# Altium PCB PCB1.PcbDoc
Units mil, origin at the board's own origin, x right, y up, seen from the top; angles counter-clockwise.
Board outline 6000 x 4000 mil, 2 copper layers (Top Layer, Bottom Layer); 98 components, 112 nets, 517 pads, 170 vias.
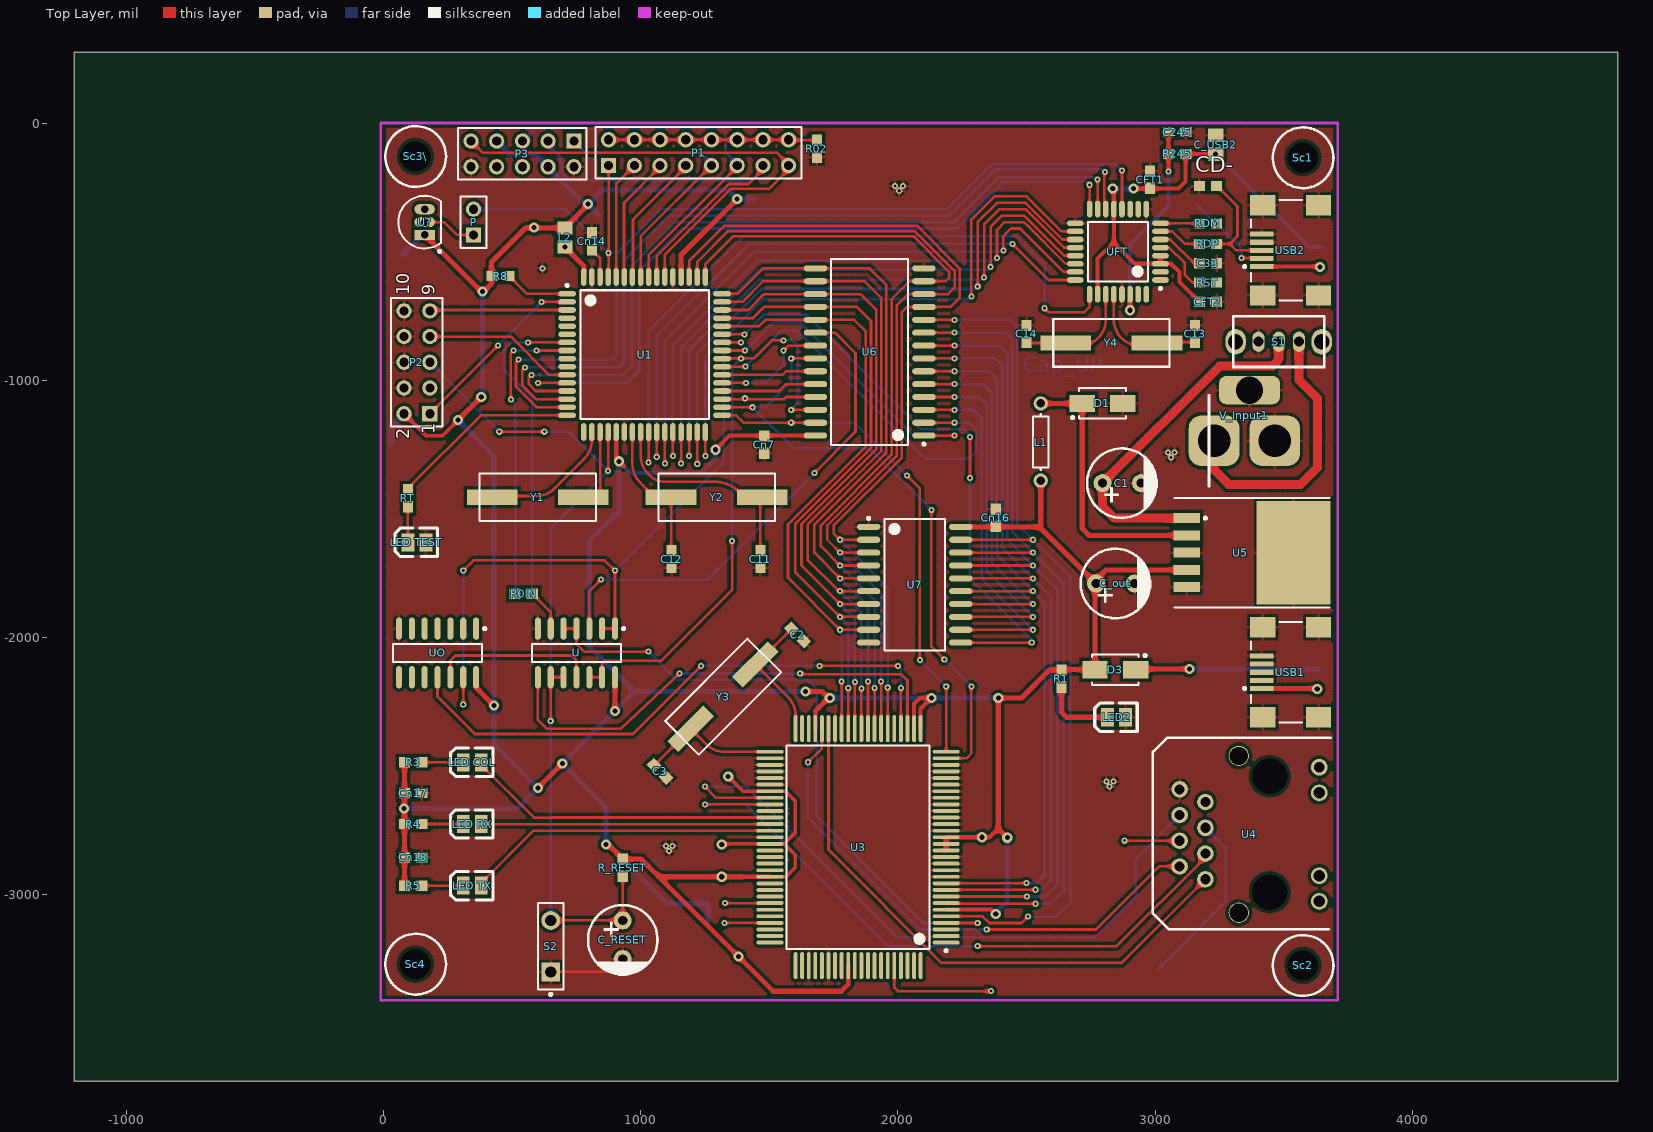
[diagram p0: Top Layer view]
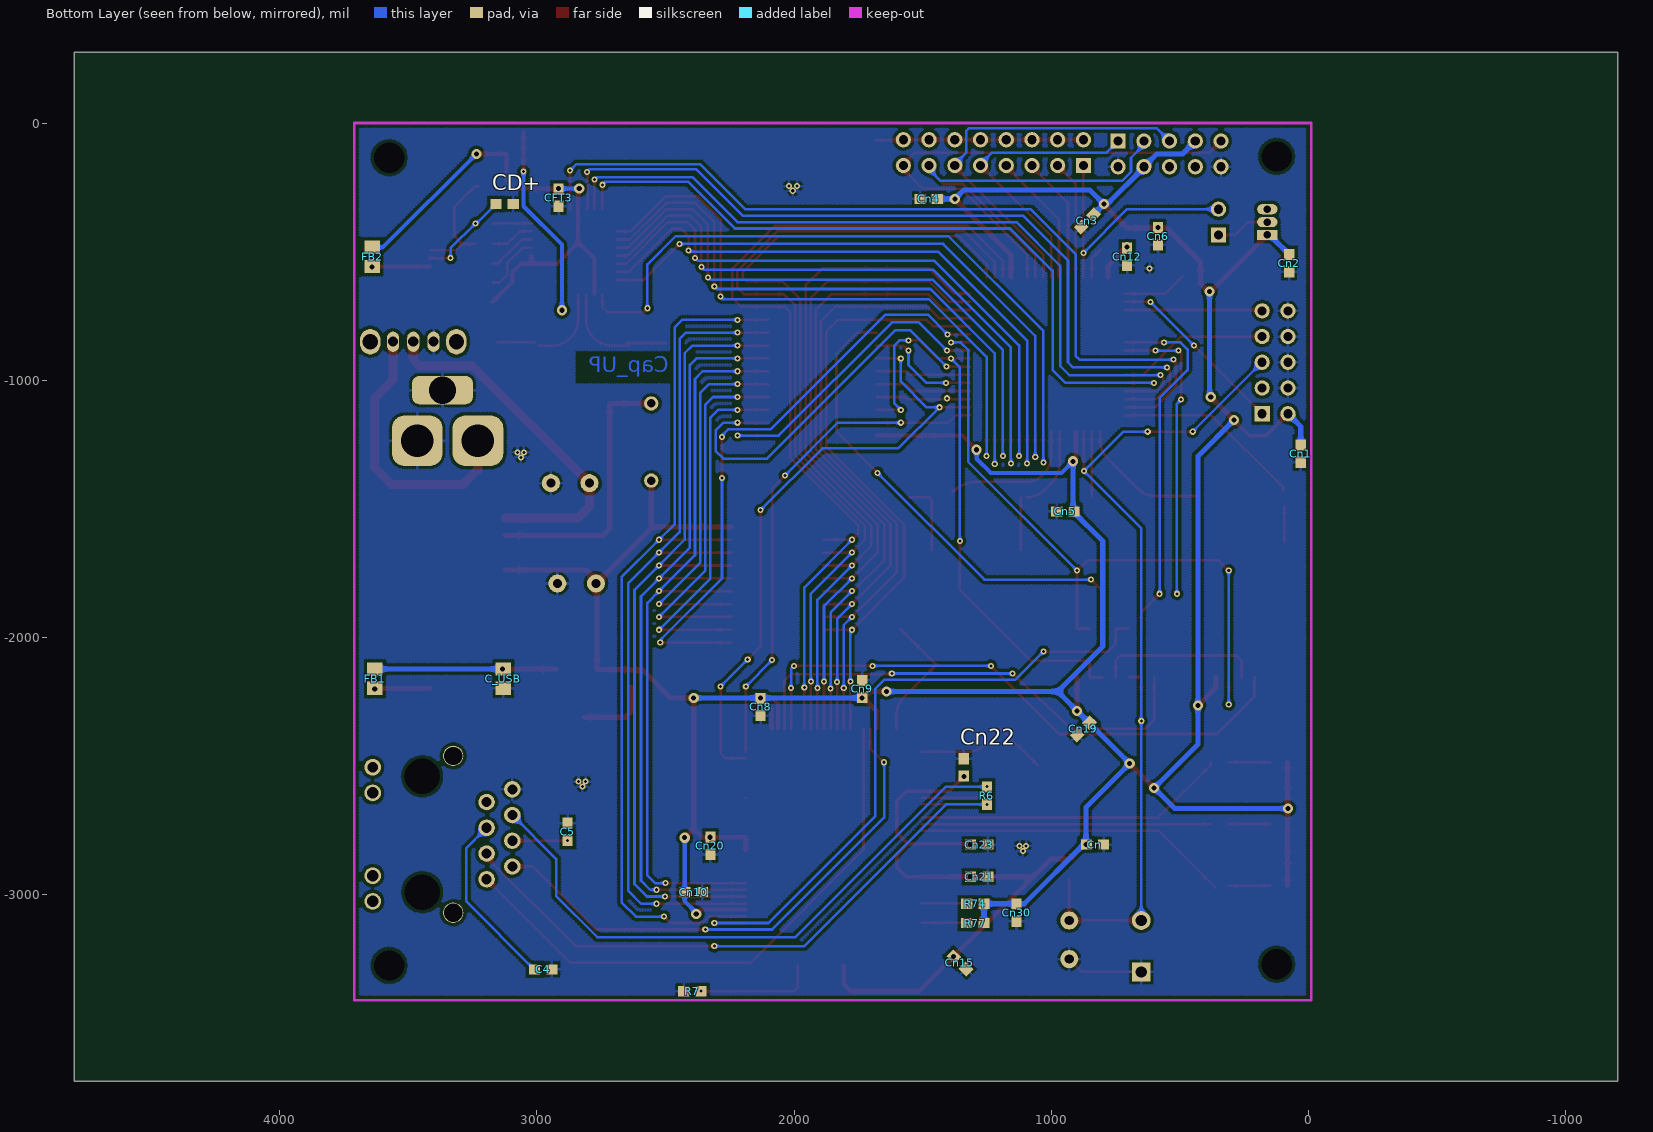
[diagram p1: Bottom Layer view, seen from below]

## Layer stack, top to bottom
Top Solder: solder mask 0.4, Solder Resist, Dk 3.5
Top Layer: signal copper 1.4
Dielectric 1: dielectric 12.6, FR-4, Dk 4.8
Bottom Layer: signal copper 1.4
Bottom Solder: solder mask 0.4, Solder Resist, Dk 3.5

## Board outline
-1202.07,-3725 4797.93,-3725 4797.93,275 -1202.07,275

## Design rules (kind name [scope] priority, off if disabled: settings)
Clearance Clearance_1 [InNamedPolygon('Bottom Layer-No Net')] p1: gap=10
Clearance [All] p2: gap=8
PolygonConnect [All] p1: connectstyle=Relief reliefconductorwidth=10 reliefentries=4 polygonreliefangle="90 Angle" airgapwidth=10
RoutingVias [All] p1: holewidth=28 width=50 viastyle="Through Hole" minholewidth=28 minwidth=50 maxholewidth=28 maxwidth=50
SolderMaskExpansion [All] p1: expansion=4
Width [All] p1: maxlimit=35 minlimit=10 preferedwidth=20
30 further rules are at their usual default settings.

## Classes and differential pairs
component class "SRAM & Expansion Port": U U6 U7
component class "Power Supply": C1 C_out C_RESET C_USB Cn Cn1 Cn2 Cn3 Cn4 Cn5 Cn6 Cn7 Cn8 Cn9 Cn10 Cn15 Cn16 Cn17 Cn18 Cn19 Cn20 Cn21 Cn22 Cn23 Cn30 D1 D3 FB1 L1 LED2 R1 R_RESET S1 S2 Sc1 Sc2 Sc3\ Sc4 U5 USB1 V_Input1
component class "Ethernet Interface": C2 C3 C4 C5 "LED COL" "LED RX" "LED TX" R0IN R3 R4 R5 R6 R7 R74 R77 U3 U4 UO Y3
component class CPU: C11 C12 C13 C14 C33 C245 C_USB2 CD+ CD- CFT1 CFT2 CFT3 Cn12 Cn14 FB2 L2 "LED TEST" P P1 P2 P3 R02 R8 R245 RDM RDP RST RT U1 U? UFT USB2 Y1 Y2 Y4

## Components (designator, comment, footprint, x,y, rotation, side; value= is the part's Value field where it differs from the comment)
C1 "Cap_El" CA1.5P 2870,-1400 r0 top
C2 "Cap_UP" 1608[0603] 1610,-1990 r315 top
C3 "Cap_UP" 1608[0603] 1075,-2520 r315 top
C4 "Cap_UP" 1608[0603] 2975,-3290 r0 bottom
C5 "Cap_UP" 1608[0603] 2880,-2755 r270 bottom
C11 "Cap_UP" 1608[0603] 1465,-1695 r270 top
C12 "Cap_UP" 1608[0603] 1120,-1695 r270 top
C13 "Cap_UP" 1608[0603] 3155,-820 r90 top
C14 "Cap_UP" 1608[0603] 2500,-820 r90 top
C33 "Cap_UP" 1608[0603] 3205,-545 r0 top
C245 "Cap_UP" 1608[0603] 3085,-35 r0 top
C_out "Cap_El" CA1.5P 2845,-1790 r0 top
C_RESET "Cap_El" CA1.5P 930,-3175 r270 top
C_USB "Cap_UP" 2012[0805] 3130,-2160 r270 bottom
C_USB2 "Cap_UP" 2012[0805] 3235,-85 r90 top
CD+ "Cap" 1608[0603] 3125,-315 r0 bottom
CD- "Cap" 1608[0603] 3205,-245 r0 top
CFT1 "Cap" 1608[0603] 2980,-220 r270 top
CFT2 "Cap" 1608[0603] 3205,-695 r180 top
CFT3 "Cap" 1608[0603] 2915,-290 r90 bottom
Cn "Cap" 1608[0603] 830,-2805 r180 bottom
Cn1 "Cap" 1608[0603] 30,-1285 r90 bottom
Cn2 "Cap" 1608[0603] 75,-545 r90 bottom
Cn3 "Cap" 1608[0603] 860,-380 r135 bottom
Cn4 "Cap" 1608[0603] 1476.54,-295 r180 bottom
Cn5 "Cap" 1608[0603] 945,-1510 r180 bottom
Cn6 "Cap" 1608[0603] 585,-440 r90 bottom
Cn7 "Cap" 1608[0603] 1480,-1250 r90 top
Cn8 "Cap" 1608[0603] 2130,-2270 r90 bottom
Cn9 "Cap" 1608[0603] 1735,-2200 r270 bottom
Cn10 "Cap" 1608[0603] 2390,-2990 r0 bottom
Cn12 "Cap" 1608[0603] 705,-520 r90 bottom
Cn14 "Cap" 1608[0603] 810,-460 r90 top
Cn15 "Cap" 1608[0603] 1355,-3265 r45 bottom
Cn16 "Cap" 1608[0603] 2380,-1535 r270 top
Cn17 "Cap" 1608[0603] 115,-2605 r180 top
Cn18 "Cap" 1608[0603] 115,-2855 r180 top
Cn19 "Cap" 1608[0603] 875,-2355 r135 bottom
Cn20 "Cap" 1608[0603] 2325,-2810 r90 bottom
Cn21 "Cap" 1608[0603] 1280,-2930 r0 bottom
Cn22 "Cap" 1608[0603] 1340,-2505 r270 bottom
Cn23 "Cap" 1608[0603] 1280,-2805 r0 bottom
Cn30 "Cap" 1608[0603] 1135,-3070 r270 bottom
D1 "1N5822" US1M 2795,-1090 r180 top
D3 "1N5819" us1m 2845,-2125 r0 top
FB1 "" 2012[0805] 3630,-2160 r90 bottom
FB2 "" 2012[0805] 3640,-520 r90 bottom
L1 "Inductor" AXIAL-0.3 2555,-1240 r270 top
L2 "Inductor" 2012[0805] 705,-445 r270 top
LED2 "LED2" 3518 2850,-2310 r180 top
"LED COL" "Yellow" 3518 345,-2485 r180 top
"LED RX" "Green" 3518 345,-2725 r180 top
"LED TEST" "BLUE" 3518 130,-1630 r180 top
"LED TX" "Yellow" 3518 345,-2965 r180 top
P "Header 2" HDR1X2 350,-435 r90 top
P1 "Header 8X2" HDR2X8 875,-165 r0 top
P2 "SPI" HDR2X5 180,-1130 r90 top
P3 "JTAG" HDR2X5 740,-70 r180 top
R0IN "Res" 1608[0603] 545,-1830 r180 top
R1 "Res" 1608[0603] 2635,-2160 r90 top
R02 "Res" 1608[0603] 1685,-100 r90 top
R3 "Res" 1608[0603] 115,-2485 r180 top
R4 "Res" 1608[0603] 115,-2725 r180 top
R5 "Res" 1608[0603] 115,-2965 r180 top
R6 "Res" 1608[0603] 1250,-2615 r270 bottom
R7 "Res" 1608[0603] 2395,-3375 r180 bottom
R8 "Res" 1608[0603] 455,-595 r0 top
R74 "Res" 1608[0603] 1295,-3035 r0 bottom
R77 "Res" 1608[0603] 1295,-3110 r0 bottom
R245 "Res" 1608[0603] 3085,-120 r180 top
R_RESET "Res" 1608[0603] 930,-2895 r270 top
RDM "Res" 1608[0603] 3205,-390 r180 top
RDP "es" 1608[0603] 3205,-470 r180 top
RST "Res" 1608[0603] 3205,-620 r0 top
RT "Res" 1608[0603] 95,-1458.46 r90 top
S1 "SW-SPDT" SW-SPDT 3480,-850 r0 top
S2 "SW-PB" SPST-2 650,-3200 r90 top
Sc1 "Screw Hole" "Screw Holw 3-6 mm" 3575,-135 r0 top
Sc2 "Screw Hole" "Screw Holw 3-6 mm" 3575,-3275 r0 top
Sc3\ "Screw Hole" "Screw Holw 3-6 mm" 125,-130 r0 top
Sc4 "Screw Hole" "Screw Holw 3-6 mm" 125,-3270 r0 top
U "SN74HC00D" D014_N 750,-2060 r270 top
U1 "ATmega128A-AU" 64A_N 1015,-900 r0 top
U3 "RTL8019AS" RTL8019AS 1845,-2815 r180 top
U4 "RJ5con_filter" RJ45con_Filter 3445,-2765 r270 top
U5 "LM2576D2T-5" 936A-02 3330,-1670 r270 top
U6 "K6X0808C1D-GF55" PRSP0028DB-B_N 1890,-890 r180 top
U7 "74AC573M" SO20_N 2065,-1795 r0 top
U? "LM35DZ" Z03A 160,-385 r0 top
UFT "FT245BL" LQFP-32_N 2855,-500 r180 top
UO "HCF4071BM1" SO14_N 210,-2060 r270 top
USB1 "" USB_Mini 3570,-2135 r90 top
USB2 "" USB_Mini 3570,-495 r90 top
V_Input1 "CHARGER" CHARGER 3465,-1235 r90 top
Y1 "32.67KHz" Xtal-smd 600,-1455 r180 top
Y2 "14.7456 MHz" Xtal-smd 1295,-1455 r180 top
Y3 "20 MHz" Xtal-smd 1320,-2230 r225 top
Y4 "6 MHz" Xtal-smd 2830,-855 r0 top

## Footprints (in the part's own frame and the unit in brackets; to place one, negate y for a bottom-side part, rotate by r counter-clockwise, add the part's x,y. Pads: shape width x height; smd on the part's side, far side on the other; paste and mask are expansions set on the pad)
64A_N [mm] "Thin QFP, 64-Leads, Body 14x14mm, Pitch 0.8mm, IPC Medium Density"
  oval 1.75x0.55 smd: 1(-7.65,6) 2(-7.65,5.2) 3(-7.65,4.4) 4(-7.65,3.6) 5(-7.65,2.8) 6(-7.65,2) 7(-7.65,1.2) 8(-7.65,0.4) 9(-7.65,-0.4) 10(-7.65,-1.2) 11(-7.65,-2) 12(-7.65,-2.8) 13(-7.65,-3.6) 14(-7.65,-4.4) 15(-7.65,-5.2) 16(-7.65,-6) 33(7.65,-6) 34(7.65,-5.2) 35(7.65,-4.4) 36(7.65,-3.6) 37(7.65,-2.8) 38(7.65,-2) 39(7.65,-1.2) 40(7.65,-0.4) 41(7.65,0.4) 42(7.65,1.2) 43(7.65,2) 44(7.65,2.8) 45(7.65,3.6) 46(7.65,4.4) 47(7.65,5.2) 48(7.65,6)
  oval 0.55x1.75 smd: 17(-6,-7.65) 18(-5.2,-7.65) 19(-4.4,-7.65) 20(-3.6,-7.65) 21(-2.8,-7.65) 22(-2,-7.65) 23(-1.2,-7.65) 24(-0.4,-7.65) 25(0.4,-7.65) 26(1.2,-7.65) 27(2,-7.65) 28(2.8,-7.65) 29(3.6,-7.65) 30(4.4,-7.65) 31(5.2,-7.65) 32(6,-7.65) 49(6,7.65) 50(5.2,7.65) 51(4.4,7.65) 52(3.6,7.65) 53(2.8,7.65) 54(2,7.65) 55(1.2,7.65) 56(0.4,7.65) 57(-0.4,7.65) 58(-1.2,7.65) 59(-2,7.65) 60(-2.8,7.65) 61(-3.6,7.65) 62(-4.4,7.65) 63(-5.2,7.65) 64(-6,7.65)
  silkscreen extent -7.77,-6.35 6.35,6.95, body extent -7,-7 7,7, height 1.2
936A-02 [mm] "D2-PAK; 5 Leads; Body 14.7 (inc. leads) x 10.2 mm (LxW max)"
  rect 1x2.6 smd: 1(-3.4,-5.275) 2(-1.7,-5.275) 3(0,-5.275) 4(1.7,-5.275) 5(3.4,-5.275)
  rect 10.2x7.3 smd: 6(0,5.275)
  silkscreen extent -5.4,-6.48 5.4,8.82
1608[0603] [mm] "Chip Capacitor; Body 1.6 x 0.8 mm (LxW typ)"
  rect 1.1x1 smd: 1(-0.85,0) 2(0.85,0)
  body extent -1.12,-0.5 1.12,0.5, height 0.5
2012[0805] [mm] "Chip Resistor; Body 2.0 x 1.3 mm (LxW typ)"
  rect 1.3x1.5 smd: 1(-0.95,0) 2(0.95,0)
  body extent -1.22,-0.75 1.28,0.75, height 0.5
3518 [mil]
  rect 50x70 smd: 1(35,0) 2(-35,0)
  silkscreen extent -80,-55 85,55, body extent -63,-31 63,32, height 43
AXIAL-0.3 [mm]
  round 1.4 hole 0.85: 1(-3.81,0) 2(3.81,0)
  silkscreen extent -2.77,-0.76 2.77,0.76, body extent -2.85,-0.87 2.85,0.87, height 2
CA1.5P [mil]
  round 70 hole 35.43: 1(-75,0) 2(75,0)
  silkscreen extent -135,-135 135,135
CHARGER [mm]
  rrect50% 2.8x6 hole 2.7: 1(5,2.5)
  rrect50% 5x5 hole 3.2: 2(0,0) 3(0,6)
  silkscreen extent -4.5,6.5 4.5,6.5
D014_N [mm] "SOIC, 14-Leads, Body 8.7x3.9mm, Pitch 1.27mm, IPC Medium Density"
  oval 2.2x0.6 smd: 1(-2.4,3.81) 2(-2.4,2.54) 3(-2.4,1.27) 4(-2.4,0) 5(-2.4,-1.27) 6(-2.4,-2.54) 7(-2.4,-3.81) 8(2.4,-3.81) 9(2.4,-2.54) 10(2.4,-1.27) 11(2.4,0) 12(2.4,1.27) 13(2.4,2.54) 14(2.4,3.81)
  silkscreen extent -2.52,-4.4 0.9,4.79, body extent -1.95,-4.33 1.95,4.33, height 1.75
HDR1X2 [mm] "Connector; Header; 2 Position"
  rect 1.5x1.5 hole 0.9: 1(0,0)
  round 1.5 hole 0.9: 2(2.54,0)
  silkscreen extent -1.27,-1.27 3.81,1.27
HDR2X5 [mm] "Connector; Header; 5x2 Position"
  rect 1.5x1.5 hole 0.9: 1(0,0)
  round 1.5 hole 0.9: 2(0,2.54) 3(2.54,0) 4(2.54,2.54) 5(5.08,0) 6(5.08,2.54) 7(7.62,0) 8(7.62,2.54) 9(10.16,0) 10(10.16,2.54)
  silkscreen extent -1.27,-1.27 11.43,3.81
HDR2X8 [mm] "Connector; Header; 8x2 Position"
  rect 1.5x1.5 hole 0.9: 1(0,0)
  round 1.5 hole 0.9: 2(0,2.54) 3(2.54,0) 4(2.54,2.54) 5(5.08,0) 6(5.08,2.54) 7(7.62,0) 8(7.62,2.54) 9(10.16,0) 10(10.16,2.54) 11(12.7,0) 12(12.7,2.54) 13(15.24,0) 14(15.24,2.54) 15(17.78,0) 16(17.78,2.54)
  silkscreen extent -1.27,-1.27 19.05,3.81
LQFP-32_N [mm] "Thin QFP, 32-Leads, Body 7x7mm, Pitch 0.8mm, IPC Medium Density"
  oval 1.65x0.55 smd: 1(-4.2,2.8) 2(-4.2,2) 3(-4.2,1.2) 4(-4.2,0.4) 5(-4.2,-0.4) 6(-4.2,-1.2) 7(-4.2,-2) 8(-4.2,-2.8) 17(4.2,-2.8) 18(4.2,-2) 19(4.2,-1.2) 20(4.2,-0.4) 21(4.2,0.4) 22(4.2,1.2) 23(4.2,2) 24(4.2,2.8)
  oval 0.55x1.65 smd: 9(-2.8,-4.2) 10(-2,-4.2) 11(-1.2,-4.2) 12(-0.4,-4.2) 13(0.4,-4.2) 14(1.2,-4.2) 15(2,-4.2) 16(2.8,-4.2) 25(2.8,4.2) 26(2,4.2) 27(1.2,4.2) 28(0.4,4.2) 29(-0.4,4.2) 30(-1.2,4.2) 31(-2,4.2) 32(-2.8,4.2)
  silkscreen extent -4.33,-2.95 2.95,3.75, body extent -3.5,-3.5 3.5,3.5, height 1.6
PRSP0028DB-B_N [mm] "SOIC, 28-Leads, Body 17.5x8.4mm, Pitch 1.27mm, IPC Medium Density"
  oval 2.3x0.6 smd: 1(-5.35,8.255) 2(-5.35,6.985) 3(-5.35,5.715) 4(-5.35,4.445) 5(-5.35,3.175) 6(-5.35,1.905) 7(-5.35,0.635) 8(-5.35,-0.635) 9(-5.35,-1.905) 10(-5.35,-3.175) 11(-5.35,-4.445) 12(-5.35,-5.715) 13(-5.35,-6.985) 14(-5.35,-8.255) 15(5.35,-8.255) 16(5.35,-6.985) 17(5.35,-5.715) 18(5.35,-4.445) 19(5.35,-3.175) 20(5.35,-1.905) 21(5.35,-0.635) 22(5.35,0.635) 23(5.35,1.905) 24(5.35,3.175) 25(5.35,4.445) 26(5.35,5.715) 27(5.35,6.985) 28(5.35,8.255)
  silkscreen extent -5.48,-9.2 3.8,9.23, body extent -4.51,-9.25 4.51,9.25, height 2.4
RJ45con_Filter [mm]
  round 1.624 hole 1: 1(4.44,-6.35) 2(3.18,-8.89) 3(1.9,-6.35) 4(0.64,-8.89) 5(-0.64,-6.35) 6(-1.9,-8.89) 7(-3.18,-6.35) 8(-4.44,-8.89)
  round 1.654 hole 1.12: 9(6.625,4.9) 10(4.085,4.9) 11(-4.085,4.9)
  round 1.654 hole 1.02: 12(-6.625,4.9)
  round 2 hole 1.793: hole(-7.745,-3.05) hole(7.745,-3.05)
  round 1.524 hole 3.5: hole(-5.715,0) hole(5.715,0)
  silkscreen extent -9.55,-11.53 9.37,6.02
RTL8019AS [mil] "QFP, 100-Leads, Body 14.00x20.00mm, Pitch 0.65mm, IPC Medium Density"
  oval 105x15 smd: 1(-342.52,371.06) 2(-342.52,345.47) 3(-342.52,319.88) 4(-342.52,294.29) 5(-342.52,268.7) 6(-342.52,243.11) 7(-342.52,217.52) 8(-342.52,191.93) 9(-342.52,166.34) 10(-342.52,140.75) 11(-342.52,115.16) 12(-342.52,89.57) 13(-342.52,63.98) 14(-342.52,38.39) 15(-342.52,12.8) 16(-342.52,-12.8) 17(-342.52,-38.39) 18(-342.52,-63.98) 19(-342.52,-89.57) 20(-342.52,-115.16) 21(-342.52,-140.75) 22(-342.52,-166.34) 23(-342.52,-191.93) 24(-342.52,-217.52) 25(-342.52,-243.11) 26(-342.52,-268.7) 27(-342.52,-294.29) 28(-342.52,-319.88) 29(-342.52,-345.47) 30(-342.52,-371.06) 51(342.52,-371.06) 52(342.52,-345.47) 53(342.52,-319.88) 54(342.52,-294.29) 55(342.52,-268.7) 56(342.52,-243.11) 57(342.52,-217.52) 58(342.52,-191.93) 59(342.52,-166.34) 60(342.52,-140.75) 61(342.52,-115.16) 62(342.52,-89.57) 63(342.52,-63.98) 64(342.52,-38.39) 65(342.52,-12.8) 66(342.52,12.8) 67(342.52,38.39) 68(342.52,63.98) 69(342.52,89.57) 70(342.52,115.16) 71(342.52,140.75) 72(342.52,166.34) 73(342.52,191.93) 74(342.52,217.52) 75(342.52,243.11) 76(342.52,268.7) 77(342.52,294.29) 78(342.52,319.88) 79(342.52,345.47) 80(342.52,371.06)
  oval 15x105 smd: 31(-243.11,-460.63) 32(-217.52,-460.63) 33(-191.93,-460.63) 34(-166.34,-460.63) 35(-140.75,-460.63) 36(-115.16,-460.63) 37(-89.57,-460.63) 38(-63.98,-460.63) 39(-38.39,-460.63) 40(-12.8,-460.63) 41(12.8,-460.63) 42(38.39,-460.63) 43(63.98,-460.63) 44(89.57,-460.63) 45(115.16,-460.63) 46(140.75,-460.63) 47(166.34,-460.63) 48(191.93,-460.63) 49(217.52,-460.63) 50(243.11,-460.63) 81(243.11,460.63) 82(217.52,460.63) 83(191.93,460.63) 84(166.34,460.63) 85(140.75,460.63) 86(115.16,460.63) 87(89.57,460.63) 88(63.98,460.63) 89(38.39,460.63) 90(12.8,460.63) 91(-12.8,460.63) 92(-38.39,460.63) 93(-63.98,460.63) 94(-89.57,460.63) 95(-115.16,460.63) 96(-140.75,460.63) 97(-166.34,460.63) 98(-191.93,460.63) 99(-217.52,460.63) 100(-243.11,460.63)
  silkscreen extent -347,-396 278,407, body extent -276,-394 276,394, height 130
"Screw Holw 3-6 mm" [mil]
  round 0 hole 118.11: 0(-1,0)
  silkscreen extent -118,-118 118,118
SO14_N [mm] "SOIC, 14-Leads, Body 8.7x3.9mm, Pitch 1.27mm, IPC Medium Density"
  oval 2.2x0.6 smd: 1(-2.4,3.81) 2(-2.4,2.54) 3(-2.4,1.27) 4(-2.4,0) 5(-2.4,-1.27) 6(-2.4,-2.54) 7(-2.4,-3.81) 8(2.4,-3.81) 9(2.4,-2.54) 10(2.4,-1.27) 11(2.4,0) 12(2.4,1.27) 13(2.4,2.54) 14(2.4,3.81)
  silkscreen extent -2.52,-4.4 0.9,4.79, body extent -1.95,-4.33 1.95,4.33, height 1.75
SO20_N [mm] "SOIC, 20-Leads, Body 12.8x7.5mm, Pitch 1.27mm, IPC Medium Density"
  oval 2.3x0.6 smd: 1(-4.55,5.715) 2(-4.55,4.445) 3(-4.55,3.175) 4(-4.55,1.905) 5(-4.55,0.635) 6(-4.55,-0.635) 7(-4.55,-1.905) 8(-4.55,-3.175) 9(-4.55,-4.445) 10(-4.55,-5.715) 11(4.55,-5.715) 12(4.55,-4.445) 13(4.55,-3.175) 14(4.55,-1.905) 15(4.55,-0.635) 16(4.55,0.635) 17(4.55,1.905) 18(4.55,3.175) 19(4.55,4.445) 20(4.55,5.715)
  silkscreen extent -4.67,-6.5 3,6.69, body extent -3.75,-6.4 3.75,6.4, height 2.65
SPST-2 [mm] "Switch; 2 Leads"
  rect 1.85x1.85 hole 1.1: 1(-2.54,0)
  round 1.85 hole 1.1: 2(2.54,0)
  silkscreen extent -4.89,-1.27 4.28,1.27
SW-SPDT [mm]
  oval 2x2.5 hole 1.5: 0(-4.25,0) 0(4.25,0)
  oval 1.2x2 hole 1: 1(-2,0) 2(0,0) 3(2,0)
  silkscreen extent -4.5,-2.5 4.5,2.5, body extent -4.52,-2.54 4.47,2.49, height 5
US1M [mm] "Molded Diode, 2-Leads, Body 4.3x2.6mm, IPC Medium Density"
  rect 2.5x1.7 smd: 1(-2,0) 2(2,0)
  silkscreen extent -2.3,-1.5 3.07,1.52, body extent -2.3,-1.46 2.3,1.46, height 2.3
us1m [mm] "Molded Diode, 2-Leads, Body 4.3x2.6mm, IPC Medium Density"
  rect 2.5x1.7 smd: 1(-2,0) 2(2,0)
  silkscreen extent -2.3,-1.5 3.08,1.52, body extent -2.3,-1.46 2.3,1.46, height 2.3
USB_Mini [mm]
  rect 0.5x2.3 smd: 1(-1.6,3.95) 2(-0.8,3.95) 3(0,3.95) 4(0.8,3.95) 5(1.6,3.95)
  rect 2x2.5 smd: 6(4.45,3.85) 7(4.45,-1.65) 8(-4.45,3.85) 9(-4.45,-1.65)
  silkscreen extent -4.95,0 4.95,5.77
Xtal-smd [mm]
  rect 5x1.5 smd: 1(-4.5,0) 2(4.5,0)
  silkscreen extent -5.75,-2.35 5.75,2.35
Z03A [mm] "TO, Flat Index; 3 In-Line, Axial Leads; Body Dia. 5mm; Leads 0.55 x 0.50 mm (max)"
  rect 2x1 hole 0.75: 1(0,-1.27)
  oval 2x1 hole 0.75: 2(0,0) 3(0,1.27)
  silkscreen extent -2.6,-3.02 1.61,2.6, body extent -2.61,-2.61 1.6,2.61, height 5.2

## Part data
C1 C2 C3 C4 C5 C11 C12 C13 C14 C33 C245 C_out C_RESET C_USB C_USB2 CD+ CD- CFT1 CFT2 CFT3 Cn1 Cn2 Cn3 Cn4 Cn5 Cn6 Cn7 Cn8 Cn9 Cn10 Cn12 Cn14 Cn15 Cn16 Cn17 Cn18 Cn19 Cn20 Cn21 Cn22 Cn23: "Capacitor"
Cn Cn30: library part Cap_UP, "Capacitor"
D1: library part Diode, "1 Amp General Purpose Rectifier"
D3: library part Diode_ShotKey, "1 Amp General Purpose Rectifier"
FB1 FB2: library part "Ferrite Beed", "Ferrite Beed"
LED2: "Typical RED, GREEN, YELLOW, AMBER GaAs LED"
"LED COL" "LED RX" "LED TEST" "LED TX": library part LED3, "Typical BLUE SiC LED"
P: "Header, 2-Pin"
P1: "Header, 8-Pin, Dual row"
P2 P3: library part "Header 5X2", "Header, 5-Pin, Dual row"
R0IN R02 R3 R4 R5 R6 R7 R8 R74 R77 R245 R_RESET RDM RST RT: "Semiconductor Resistor"
R1: library part Res3, "Resistor"
RDP: library part Res, "Semiconductor Resistor"
S1: "SPDT Subminiature Toggle Switch, Right Angle Mounting, Vertical Actuation"
S2: "Switch"
U: "Quadruple 2-Input Positive-NAND Gate"
U1: "8-bit AVR Microcontroller, 2.7-5.5V, 16MHz, 128KB Flash, 4KB EEPROM, 4KB SRAM, 64-pin TQFP, Industrial Grade (-40°C to 85°C)"
U3: library part RTL8019_as
U4: library part HR911105A
U5: "Easy Switcher 3.0A Step-Down Voltage Regulator"
U6: library part M5M5256DFP-55LL, "262144-bit (32768-word x 8-bit) CMOS SRAM"
U7: "Octal D-Type Latch with 3-State Output Non-Inverting"
U?: "Precision Centigrade Temperature Sensor, 3-pin TO-92"
UFT: "USB/Parallel FIFO Bi-Directional Data Transfer Chip, LQFP-32, Pb-Free"
UO: "Quad 2-Input OR Gate"
USB1 USB2: library part 440479-1, "USB 2.0, Right Angle, SMT, AB Type, Receptacle, 5 Position, Black"
Y1 Y2 Y3 Y4: library part XTAL, "Crystal Oscillator"

## Via types
v1: diameter 23.62, hole 11.81, Top Layer to Bottom Layer, 137 vias
v2: diameter 39.37, hole 19.68, Top Layer to Bottom Layer, 33 vias

## Nets (pads, with @x,y where several pads share a name; then routed paths per layer and width w, separated by ;. In a path a pad name is that pad's centre, name@x,y a point inside that pad or via, vN(x,y) a via of type N, cw(c..) or ccw(c..) an arc to the next point about the centre after c; other vN are vias at no path point)
A0: U3.5 U6.10 U7.19 | length 3510.9
  Top Layer w10: U6.10 v1(2220,-765) ; U3.5@2188.82,-3085 U3.5 2328.7,-3083.7 2355,-3110 2480,-3110 v1(2505,-3085) ; U7.19 v1(2525,-1620)
  Bottom Layer w10: v1(2220,-765) 2435,-765 2463.5,-793.5 2463.5,-1558.5 v1(2525,-1620) 2670,-1765 2670,-3030 2615,-3085 v1(2505,-3085) v1@2500,-3085
A1: U3.7 U6.9 U7.18 | length 3343.2
  Top Layer w10: U6.9 v1(2220,-815) ; U3.7@2187.52,-3034.81 U3.7 ; U3.7@2187.71,-3035 v1(2535,-3035) ; U7.18 v1(2525,-1670)
  Bottom Layer w10: v1(2220,-815) 2420,-815 2445,-840 2445,-1590 v1(2525,-1670) 2645,-1790 2645,-2984.04 2594.04,-3035 v1(2535,-3035)
A2: U3.8 U6.8 U7.17 | length 3219
  Top Layer w10: U6.8 v1(2220,-865) ; U3.8@2190.59,-3010 U3.8 v1(2501.93,-3006.93) ; U7.17 v1(2525,-1720)
  Bottom Layer w10: v1(2220,-865) 2395,-865 2425,-895 2425,-1620 v1(2525,-1720) 2620,-1815 2620,-2958.86 2571.93,-3006.93 v1(2501.93,-3006.93)
A3: U3.9 U6.7 U7.16 | length 3101.9
  Top Layer w10: U6.7 v1(2220,-915) ; U3.9 2188.3,-2980.56 v1(2534.44,-2980.56) ; U7.16 v1(2525,-1770)
  Bottom Layer w10: v1(2220,-915) 2380,-915 2405,-940 2405,-1650 v1(2525,-1770) 2595,-1840 2595,-2945.12 2559.56,-2980.56 v1(2534.44,-2980.56)
A4: U3.10 U6.6 U7.15 | length 2980.1
  Top Layer w10: U6.6 v1(2220,-965) ; U3.10 2188.27,-2955 v1(2500,-2955) ; U7.15 v1(2525,-1820)
  Bottom Layer w10: v1(2220,-965) 2355,-965 2385,-995 2385,-1680 v1(2525,-1820) 2570,-1865 2570,-2925 2539.25,-2955.75 2538.5,-2955 v1(2500,-2955)
A5: U6.5 U7.14 | length 1446
  Top Layer w10: U6.5 v1(2220,-1015) ; U7.14 v1(2525,-1870)
  Bottom Layer w10: v1(2220,-1015) 2330,-1015 2365,-1050 2365,-1710 v1(2525,-1870)
A6: U6.4 U7.13 | length 1437.2
  Top Layer w10: U6.4 v1(2220,-1065) ; U7.13 v1(2525,-1920)
  Bottom Layer w10: v1(2220,-1065) 2315,-1065 2345,-1095 2345,-1740 v1(2525,-1920)
A7: U6.3 U7.12 | length 1425.5
  Top Layer w10: U6.3 v1(2220,-1115) ; U7.12 v1(2525,-1970)
  Bottom Layer w10: v1(2220,-1115) 2295,-1115 2325,-1145 2325,-1770 v1(2525,-1970)
A8: U1.35 U6.25 | length 366.6
  Top Layer w10: U1.35 1556.77,-1073.23 1565,-1065 U6.25
  other v1: 1405,-1070
A9: U1.36 U6.24 | length 374.3
  Top Layer w10: U1.36 1538.27,-1041.73 1565,-1015 U6.24
A10: U1.37 U6.21 | length 455.6
  Top Layer w10: U1.37 1316.42,-1010 v1(1410,-1010) ; v1(1555,-885) 1575,-865 U6.21
  Bottom Layer w10: v1(1410,-1010) 1485,-1010 1555,-940 v1(1555,-885)
A11: U1.38 U6.23 | length 368.9
  Top Layer w10: U1.38 1551.26,-978.74 1565,-965 U6.23
A12: U1.39 U6.2 | length 1564.1
  Top Layer w10: U1.39 v1(1407.24,-947.24) ; U6.2 v1(2220,-1165)
  Bottom Layer w10: v1(1407.24,-947.24) 1549.49,-805 1605,-805 2105,-1305 2275,-1305 2305,-1275 2305,-1195 2275,-1165 v1(2220,-1165)
A13: U1.40 U6.26 U.12 U.13 | length 2327.9
  Top Layer w10: U.12@800.51,-2155 849.49,-2155 U.13 850,-2100 860,-2090 1080,-2090 1355,-1815 v1(1355,-1625) ; U1.40 1316.93,-915 v1(1390,-915) 1440,-915 1510,-845 v1(1555,-845) ; v1(1585,-1115) U6.26
  Bottom Layer w10: v1(1355,-1625) 1355,-950 v1(1390,-915) ; v1(1555,-845) 1590,-845 1610,-865 1610,-1090 v1(1585,-1115)
A14: U1.41 U6.1 | length 1251.3
  Top Layer w10: U1.41 1404.25,-884.25 v1(1405,-885) ; U6.1 v1(2220,-1215)
  Bottom Layer w10: v1(1405,-885) 1515,-775 1620,-775 2060,-1215 v1(2220,-1215)
A15: U1.42 U.1 U.2 UO.13 | length 2710.3
  Top Layer w10: v1(310,-2260) UO.13 ; v1(310,-1740) 350,-1700 860,-1700 v1(900,-1740) U.1 U.2 ; U1.42 v1(1390,-852.76)
  Bottom Layer w10: v1(310,-2260) v1(310,-1740) ; v1(900,-1740) 1322.69,-1317.31 1322.69,-882.31 1352.24,-852.76 v1(1390,-852.76)
AGND: P1.2 P1.4 P1.6 P1.8 P1.10 P1.12 P1.14 P1.16 R02.2 | length 810.6
  Top Layer w10: P1.2 P1.4 P1.6 P1.8 P1.10 P1.12 P1.14 P1.16 1576.54,-66.54 R02.2
ALE: U1.43 U7.11 | length 2375.4
  Top Layer w10: U1.43 v1(1403.74,-821.26) v1@1408.74,-821.26 ; U7.11 v1(2520,-2020) ; v1(2280,-1380) v1(2280,-1220)
  Bottom Layer w10: v1(1403.74,-821.26) 1480,-745 1645,-745 2090.19,-1190.19 2255.19,-1190.19 2280,-1215 v1(2280,-1220) ; v1(2280,-1380) 2280,-1770 2520,-2010 v1(2520,-2020)
AVCC: Cn12.2 L2.2 U1.64 | length 147
  Top Layer w20: v2(705,-482.4) 778.78,-556.18 U1.64
D0: U1.51 U3.36 U6.11 U7.2 | length 3529.5
  Top Layer w10: U1.51 1188.23,-536.77 1326,-399 2074,-399 2240,-565 2240,-680 2205,-715 U6.11 2035,-715 2015,-735 2015,-1300 1750,-1565 1750,-1595 v1(1775,-1620) U7.2 ; U3.36 v1(1960.16,-2195.16)
  Bottom Layer w10: v1(1775,-1620) 1960.16,-1805.16 v1(1960.16,-2195.16)
D1: U1.50 U3.37 U6.12 U7.3 | length 3445.7
  Top Layer w10: U1.50 1219.72,-540.28 1340,-420 2065,-420 2220,-575 2220,-640 2195,-665 U6.12 2040,-665 1995,-710 1995,-1294.54 1725,-1564.54 1725,-1620 v1(1775,-1670) U7.3 ; U3.37 v1(1934.57,-2170.43)
  Bottom Layer w10: v1(1775,-1670) 1934.57,-1829.57 v1(1934.57,-2170.43)
D2: U1.49 U3.38 U6.13 U7.4 | length 3362.5
  Top Layer w10: U1.49 1251.22,-548.78 1360,-440 2059.54,-440 2200,-580.46 2200,-600 2185,-615 U6.13 2045,-615 1975,-685 1975,-1289.09 1700,-1564.09 1700,-1645 v1(1775,-1720) U7.4 ; U3.38 v1(1908.98,-2196.02)
  Bottom Layer w10: v1(1775,-1720) 1908.98,-1853.98 v1(1908.98,-2196.02)
D3: U1.48 U3.39 U6.15 U7.5 | length 2744.2
  Top Layer w10: U1.48 1376.22,-663.78 1475,-565 U6.15 1890,-565 1955,-630 1955,-1280 1675,-1560 1675,-1670 v1(1775,-1770) U7.5 ; U3.39 v1(1883.39,-2171.61)
  Bottom Layer w10: v1(1775,-1770) 1883.39,-1878.39 v1(1883.39,-2171.61)
D4: U1.47 U3.40 U6.16 U7.6 | length 2671.3
  Top Layer w10: U1.47 1394.72,-695.28 1475,-615 U6.16 1870,-615 1935,-680 1935,-1274.54 1650,-1559.54 1650,-1700 1770,-1820 U7.6 ; U3.40 v1(1857.8,-2197.8)
  Bottom Layer w10: v1(1775,-1820) 1857.8,-1902.8 v1(1857.8,-2197.8)
D5: U1.46 U3.41 U6.17 U7.7 | length 2595.4
  Top Layer w10: U1.46 1418.23,-726.77 1480,-665 U6.17 1855,-665 1915,-725 1915,-1269.09 1625,-1559.09 1625,-1720 v1(1775,-1870) U7.7 ; U3.41 v1(1832.2,-2172.2)
  Bottom Layer w10: v1(1775,-1870) 1832.2,-1927.2 v1(1832.2,-2172.2)
D6: U1.45 U3.42 U6.18 U7.8 | length 2522.5
  Top Layer w10: U1.45 1436.73,-758.27 1480,-715 U6.18 1840,-715 1895,-770 1895,-1263.63 1600,-1558.63 1600,-1745 v1(1775,-1920) U7.8 ; U3.42 v1(1806.61,-2196.61)
  Bottom Layer w10: v1(1775,-1920) 1806.61,-1951.61 v1(1806.61,-2196.61)
D7: U1.44 U3.43 U6.19 U7.9 | length 2455.1
  Top Layer w10: U1.44 1460.24,-789.76 1485,-765 U6.19 1830,-765 1875,-810 1875,-1258.18 1573.18,-1560 1572.47,-1560 1572.47,-1767.47 v1(1775,-1970) U7.9 ; U3.43 v1(1781.02,-2171.02)
  Bottom Layer w10: v1(1775,-1970) 1781.02,-1976.02 v1(1781.02,-2171.02)
D+: CD-.2 RDP.1 USB2.3 | length 468.5
  Top Layer w10: CD-.2@3228.46,-245 3240,-245 3320,-325 3320,-440 3290,-470 ; RDP.1 3290,-470 ; USB2.3 3315,-495 3290,-470
D-: CD+.2 RDM.1 USB2.2 | length 366.2
  Top Layer w10: v1(3335,-525) USB2.2@3412.99,-525
  Top Layer w16: USB2.2@3412.99,-525 USB2.2
  Bottom Layer w10: CD+.2 3233.46,-390 v1(3238.46,-390) 3335,-486.54 v1(3335,-525)
DC: C1.1 S1.2 U5.1 | length 1390.3
  Top Layer w35: U5.1 2841.14,-1536.14 2795,-1490 C1.1 3250,-945 3455,-945 3480,-920 S1.2
GND: "LED TEST.2" C1.2 C2.2 C3.2 C4.1 C5.1 C11.2 C12.2 C13.2 C14.2 C33.2 C245.2 C_out.2 C_RESET.2 C_USB2.2 C_USB.2 CD+.1 CD-.1 CFT1.1 CFT2.1 CFT3.1 Cn1.1 Cn2.1 Cn3.1 Cn4.1 Cn5.1 Cn6.1 Cn7.1 Cn8.1 Cn9.1 Cn10.1 Cn12.1 Cn14.2 Cn15.1 Cn16.1 Cn17.1 Cn18.1 Cn19.1 Cn20.1 Cn21.1 Cn22.1 Cn23.1 Cn30.2 Cn.2 D1.1 LED2.2 P2.4 P2.6 P2.8 P2.10 P3.2 P3.10 R02.1 R7.1 S1.1 S2.1 U1.22 U1.53 U1.63 U3.11 U3.12 U3.13 U3.14 U3.18 U3.19 U3.20 U3.21 U3.22 U3.23 U3.24 U3.25 U3.26 U3.27 U3.28 U3.44 U3.52 U3.53 U3.54 U3.55 U3.56 U3.64 U3.83 U3.86 U4.8 U5.3 U5.5 U5.6 U6.14 U7.1 U7.10 U.7 UFT.9 UFT.17 UFT.29 UO.7 USB1.4 USB1.5 USB1.6 USB1.7 USB1.8 USB1.9 USB2.4 USB2.5 USB2.6 USB2.7 USB2.8 USB2.9 V_Input1.1 V_Input1.2 | length 306.5
  Top Layer w10: S2.1@645,-3300 880,-3300 C_RESET.2 ; U3.23 U3.23@2188.09,-2622.5
  other v1: 1110,-2830 1097.93,-2810 1122.93,-2810 2822.93,-2580 2810,-2560 2837.93,-2560 3062.07,-1300 3050,-1280 3075,-1280 617.93,-565 2005,-263.19 1987.93,-245 2020,-245
"LED COL": "LED COL.2" U3.61 | length 1217.8
  Top Layer w10: 380,-2485 380,-2495 585,-2700 655,-2700 654.84,-2699.84 U3.61
"LED RX": "LED RX.2" U3.62 | length 1122.5
  Top Layer w10: 380,-2725 U3.62
"LED TX": "LED TX.2" U3.63 | length 1231.7
  Top Layer w10: 362.5,-2972.5 583.98,-2751.02 U3.63
NetC2_1: C2.1 U3.50 Y3.1 | length 505.9
  Top Layer w10: Y3.1 1572.6,-2232.05 cw(c1501.89,-2302.76) 1601.89,-2302.76 U3.50 ; Y3.1@1447.95,-2104.73 C2.1
NetC3_1: C3.1 U3.51 Y3.2 | length 539.7
  Top Layer w10: C3.1@1053.66,-2496.34 Y3.2 1254.1,-2414.65 ccw(c1324.81,-2343.94) 1324.81,-2443.94 U3.51
NetC33_1: C33.1 UFT.6 | length 189.4
  Top Layer w10: UFT.6 3057.76,-452.76 3150,-545 C33.1
NetC245_1: C245.1 R245.2 UFT.30 | length 817
  Top Layer w16: v2(2902.24,-727.76) UFT.30 ; v1(3051.54,-188.46) R245.2 C245.1
  Bottom Layer w16: v2(2902.24,-727.76) 2902.24,-472.76 3051.54,-323.46 v1(3051.54,-188.46)
NetCn14_1: Cn14.1 U1.62 | length 118.5
  Top Layer w10: Cn14.1 841.77,-525.24 U1.62
NetD1_2: D1.2 L1.1 U5.2 | length 1064.7
  Top Layer w20: L1.1 D1.2 2716.26,-1576.26 2743.07,-1603.07 U5.2
NetFB1_1: FB1.1 USB1.1 | length 216
  Top Layer w20: USB1.1 3625.15,-2197.99 cw(c3625.15,-2204.85) v2(3630,-2200)
NetFB2_1: FB2.1 USB2.1 | length 226
  Top Layer w16: USB2.1 3635.15,-557.99 cw(c3635.15,-564.85) v2(3640,-560)
NetLED2_1: LED2.1 R1.1 | length 284.8
  Top Layer w20: R1.1 2635,-2290 2655,-2310 LED2.1
"NetLED COL_1": "LED COL.1" R3.1 | length 161.5
  Top Layer w10: R3.1 310,-2485
"NetLED RX_1": "LED RX.1" R4.1 | length 161.5
  Top Layer w10: R4.1 310,-2725
"NetLED TEST_1": "LED TEST.1" RT.1 | length 138.1
  Top Layer w10: 95,-1630 RT.1
"NetLED TX_1": "LED TX.1" R5.1 | length 161.5
  Top Layer w10: R5.1 310,-2965
NetP_1: P.1 U?.2 | length 210.7
  Top Layer w10: U?.2 235,-385 285,-435 P.1
NetR7_2: R7.2 U3.96 | length 465.3
  Top Layer w10: U3.96 1985.75,-3360.75 2000,-3375 v1@2360,-3375
  other v1: 2361.54,-3375
NetR8_2: R8.2 U1.1 | length 253.8
  Top Layer w10: R8.2 557.24,-663.78 U1.1
NetR74_2: R74.2 U3.74 | length 175
  Top Layer w10: v1(1327.52,-3032.52) U3.74
NetR77_2: R77.2 U3.77 | length 176.8
  Top Layer w10: v1(1325.71,-3109.29) U3.77
NetRDM_2: RDM.2 UFT.8 | length 151.3
  Top Layer w10: UFT.8 3020.59,-390 RDM.2
NetRDP_2: RDP.2 UFT.7 | length 171.4
  Top Layer w10: UFT.7 3066.26,-421.26 3115,-470 RDP.2
NetS1_3: S1.3 V_Input1.3 | length 1084.7
  Top Layer w35: V_Input1.3 3228.78,-1348.78 3285,-1405 3565,-1405 3630,-1340 3630,-1070 3558.74,-998.74 S1.3
NetU1_18: U1.18 Y1.2 | length 517.8
  Top Layer w10: Y1.2@430,-1450 593.58,-1450 ccw(c593.58,-1350) 664.29,-1420.71 780.99,-1304.01 ccw(c710.28,-1233.3) 810.28,-1233.3 U1.18
NetU1_19: U1.19 Y1.1 | length 253.8
  Top Layer w10: Y1.1@841.77,-1455 U1.19
NetU3_4: U3.4 U.4 U.5 | length 2530.7
  Top Layer w10: U.5 U.4 750,-2025 780,-2055 v1(1030,-2055) ; U3.4@2188.23,-3110 v1(2310,-3110)
  Bottom Layer w10: v1(1030,-2055) 1125.19,-2150.19 1125.19,-2150.28 1139.91,-2165 1650,-2165 1685,-2200 1685,-2695 2100,-3110 v1(2310,-3110)
NetU3_33: U3.33 U.8 | length 1905.3
  Top Layer w10: U.8 600,-2320 635,-2355 922.1,-2355 v1(1150,-2140) ; v1(1620,-2140) 1623,-2143 2013,-2143 2036.93,-2166.93 U3.33 U3.33@2040,-2351.3
  Bottom Layer w10: v1(1150,-2140) v1(1620,-2140)
NetU3_34: U3.34 UO.11 | length 2284.5
  Top Layer w10: UO.11 210,-2230 355.07,-2375.07 969.93,-2375.07 v1(1235,-2110) ; v1(1695,-2110) v1(2000,-2110) ; U3.34 v1(2011.34,-2196.34)
  Bottom Layer w10: v1(1235,-2110) v1(1695,-2110) ; v1(2000,-2110) 2011.34,-2121.34 v1(2011.34,-2196.34)
NetU6_20: U6.20 U.3 | length 1931.1
  Top Layer w10: U.3 800,-1820 v1(845,-1775) ; v1(1675,-1360) 1835,-1200 1835,-895 1755,-815 U6.20
  Bottom Layer w10: v1(845,-1775) 1260,-1775 v1(1675,-1360)
NetU_11: U.11 UO.12 | length 635.5
  Top Layer w10: UO.12 260,-2090 280,-2070 730,-2070 750,-2090 U.11
P1: U3.45 U4.1 | length 2252.9
  Top Layer w10: U3.45@1730,-2354.21 U3.45 1729.84,-2824.84 2170,-3265 2869.8,-3265 U4.1
P2: U3.46 U4.2 | length 2109.8
  Top Layer w10: v1(1650,-2485) 1704.25,-2430.75 U3.46 ; v1(2345,-3135) 2770,-3135 3015,-2890 U4.2@3110,-2890
  Bottom Layer w10: v1(1650,-2485) 1650,-2700 2085,-3135 v1(2345,-3135)
P3: R6.2 U3.59 U4.3 | length 2584
  Top Layer w10: v1(1250,-2648.66) U3.59 ; v1(2310,-3200) 2850,-3200 3195,-2855 U4.3
  Bottom Layer w10: v1(1250,-2648.66) 1408.66,-2648.66 1960,-3200 v1(2310,-3200)
P4: C5.2 U4.4 | length 215
  Top Layer w10: v1(2880,-2790) U4.4@3095,-2790
P5: C4.2 U4.5 | length 697.4
  Bottom Layer w10: C4.2@3010,-3290 3275,-3025 3275,-2820 3202.4,-2747.4 U4.5@3202.4,-2732.4
P6: R6.1 U3.58 U4.6 | length 2639.1
  Top Layer w10: v1(1250,-2580) 1293.07,-2623.07 U3.58
  Bottom Layer w10: v1(1250,-2580) 1410,-2580 1995,-3165 2765,-3165 2925,-3005 2925,-2860.2 U4.6
PB0: U1.10
PB1: P2.7 U1.11 | length 595.4
  Top Layer w10: P2.7 495,-830 643.74,-978.74 U1.11
PB2: U1.12 UFT.16 | length 2907.7
  Top Layer w10: v1(600,-1010) 600.24,-1010.24 U1.12 ; UFT.16 v1(2744.76,-240)
  Bottom Layer w10: v1(600,-1010) 945,-1010 995,-960 995,-575 1160,-410 2230,-410 2412,-228 2732.76,-228 v1(2744.76,-240)
PB3: U1.13 UFT.15 | length 3066.5
  Top Layer w10: v1(575,-980) 565,-990 565,-1015 591.73,-1041.73 U1.13 ; UFT.15 v1(2776.26,-220)
  Bottom Layer w10: v1(575,-980) 930,-980 965,-945 965,-555 1135,-385 2220,-385 2395,-210 2766.26,-210 v1(2776.26,-220)
PB4: U1.14 UFT.14 | length 3227.5
  Top Layer w10: v1(550,-950) 540,-960 540,-1020 593.23,-1073.23 U1.14 ; v1(2805,-190) 2802.31,-192.69 2802.31,-329.2 UFT.14
  Bottom Layer w10: v1(550,-950) 915,-950 935,-930 935,-535 1110,-360 2200,-360 2380,-180 2795,-180 v1(2805,-190)
PB5: U1.15 UFT.12 | length 3393.2
  Top Layer w10: v1(525,-920) 515,-930 515,-1025 594.72,-1104.72 U1.15 ; UFT.12 v1(2870.75,-185)
  Bottom Layer w10: v1@524.72,-920 v1(525,-920) 890,-920 905,-905 905,-510 1080,-335 2190,-335 2365,-160 2845.75,-160 v1(2870.75,-185)
PB6: RT.2 U1.16 | length 742.8
  Top Layer w10: RT.2@97.5,-1427.5 97.5,-1417.5 378.78,-1136.22 U1.16
PB7: U1.17
PD0: U1.25 UFT.25 | length 2774.7
  Top Layer w10: v1(1030.75,-1319.25) U1.25 ; v1(2570,-720) 2585,-735 2725,-735 2744.76,-715.24 UFT.25
  Bottom Layer w10: v1(1030.75,-1319.25) 1030.75,-809.25 1399.81,-440.19 2460.19,-440.19 2570,-550 v1(2570,-720)
PD1: U1.26 UFT.24 | length 2400.3
  Top Layer w10: v1(1062.24,-1297.76) U1.26 ; v1(2445,-470) 2585.24,-610.24 UFT.24
  Bottom Layer w10: v1(1062.24,-1297.76) 1062.24,-827.76 1420,-470 v1(2445,-470)
PD2: U1.27 UFT.23 | length 2478.8
  Top Layer w10: v1(1093.74,-1323.74) U1.27 ; v1(2410,-495) 2410,-440 2440,-410 2475,-410 2643.74,-578.74 UFT.23
  Bottom Layer w10: v1(1093.74,-1323.74) 1093.74,-846.26 1439.81,-500.19 2404.81,-500.19 v1(2410,-495)
PD3: U1.28 UFT.22 | length 2418.4
  Top Layer w10: v1(1125.24,-1294.76) U1.28 ; v1(2385,-525) 2385,-415 2415,-385 2490,-385 2652.24,-547.24 UFT.22
  Bottom Layer w10: v1(1125.24,-1294.76) 1125.24,-864.76 1455,-535 2375,-535 v1(2385,-525)
PD4: U1.29 UFT.21 | length 2472.9
  Top Layer w10: v1(1156.73,-1323.27) U1.29 ; v1(2360,-560) 2360,-405 2405,-360 2490.46,-360 2646.2,-515.75 UFT.21
  Bottom Layer w10: v1(1156.73,-1323.27) 1156.73,-873.27 1460,-570 2350,-570 v1(2360,-560)
PD5: U1.30 UFT.20 | length 2416.9
  Top Layer w10: v1(1188.23,-1295) U1.30 ; v1(2335,-600) 2335,-395 2395,-335 2495.46,-335 2644.71,-484.25 UFT.20
  Bottom Layer w10: v1(1188.23,-1295) 1188.23,-881.77 1460,-610 2325,-610 v1(2335,-600)
PD6: U1.31 UFT.19 | length 2470.9
  Top Layer w10: v1(1219.72,-1324.72) U1.31 ; v1(2310,-635) 2310,-385 2385,-310 2495.91,-310 2638.67,-452.76 UFT.19
  Bottom Layer w10: v1(1219.72,-1324.72) 1219.72,-895.28 1469.81,-645.19 2299.81,-645.19 v1(2310,-635)
PD7: U1.32 UFT.18 | length 2411.9
  Top Layer w10: v1(1251.22,-1295) U1.32 ; v1(2285,-675) 2285,-375 2375,-285 2500,-285 2636.26,-421.26 UFT.18
  Bottom Layer w10: v1(1251.22,-1295) 1251.22,-908.78 1475,-685 2280,-685 2285,-680 v1(2285,-675)
PE0: P2.1 U1.2 | length 713.7
  Top Layer w10: P2.1 v1(445,-865) ; v1@615.28,-695.28 U1.2
  Bottom Layer w10: v1(445,-865) v1(615,-695)
PE1: P2.9 U1.3 | length 535.2
  Top Layer w10: P2.9 183.23,-726.77 U1.3
PE2: U1.4
PE3: U1.5
PE4: U1.6
PE5: R0IN.1 U1.7 U.6 | length 1419.2
  Top Layer w10: v1@560,-855 v1(562.24,-852.76) U1.7 ; v1(578.46,-1830) 580,-1830 650,-1900 U.6
  Bottom Layer w10: v1(562.24,-852.76) 497.24,-852.76 470,-880 470,-960 578.46,-1068.46 v1(578.46,-1830)
PE6: R0IN.2 U1.8 | length 1165.1
  Top Layer w10: v1(495,-1075) 495,-895 v1(505,-885) ; v1(595,-885) 595.75,-884.25 U1.8
  Bottom Layer w10: v1(495,-1075) 511.54,-1091.54 v1(511.54,-1830) ; v1(505,-885) v1(595,-885)
PE7: U1.9
PF0: P1.1 P.2 U1.61 | length 1050
  Top Layer w10: P1.1@855,-165 P1.1 v1(875,-505) 875,-597.09 U1.61
  Bottom Layer w10: P.2 705,-335 v1(875,-505)
PF1: P1.3 U1.60 | length 463.1
  Top Layer w10: U1.60 904.76,-235 905,-235 P1.3
PF2: P1.5 U1.59 | length 487.3
  Top Layer w10: U1.59 935,-597.56 935,-310 P1.5@1075,-170
PF3: P1.7 U1.58 | length 518.2
  Top Layer w10: U1.58 970,-596.57 970,-375 P1.7@1177.5,-167.5
PF4: P1.9 P3.1 U1.57 | length 1138.9
  Top Layer w10: U1.57 1000,-598.07 1000,-440 1267.5,-172.5 P1.9@1282.5,-172.5
  Bottom Layer w10: P3.1 785,-115 1230,-115 P1.9@1285,-170
PF5: P1.11 P3.5 U1.56 | length 1552.8
  Top Layer w10: U1.56 1030.75,-513.8 1325.54,-219 1326,-219 P1.11@1377.5,-167.5
  Bottom Layer w10: P3.5 590,-20 1320,-20 1330,-30 1330,-115 P1.11@1385,-170
PF6: P1.13 P3.3 U1.55 | length 1620.9
  Top Layer w10: U1.55 1062.24,-517.76 1343,-237 1418,-237 P1.13@1485,-170
  Bottom Layer w10: P3.3 640,-85 690,-135 690,-190 725,-225 1430,-225 P1.13@1485,-170
PF7: P1.15 P3.9 U1.54 | length 2006.3
  Top Layer w10: P3.9 385,-115 1530,-115 1585,-170 1500,-255 1350.46,-255 1093.74,-511.72 U1.54
R\D\: U1.34 U3.29 U6.22 | length 2474.3
  Top Layer w10: U1.34 1321.46,-1110 1326.46,-1105 v1(1435,-1105) ; v1(1585,-915) U6.22 ; v1(2130,-1505) 2130,-2035 v1(2180,-2085) ; U3.29 2265.47,-2469.53 2285,-2450 v1(2285,-2190)
  Bottom Layer w10: v1(1585,-915) 1585,-1005 1485,-1105 v1(1435,-1105) 1595,-1265 1890,-1265 v1(2130,-1505) ; v1(2180,-2085) v1(2285,-2190)
RST: C_RESET.1 P2.5 R_RESET.2 S2.2 U1.20 U.9 U.10 | length 3526
  Top Layer w10: v1(450,-1200) v1(625,-1200) ; S2.2@645,-3100 C_RESET.1 930,-2941.54 R_RESET.2@931.54,-2940 ; v1@650,-2320 U.9 U.10 ; v1(873.27,-1353.27) U1.20
  Bottom Layer w10: P2.5 v1(450,-1200) v1@455,-1200 ; v1(625,-1200) 720,-1200 v1(873.27,-1353.27) 650,-1576.54 v1(650,-2325) S2.2
RSTOUT: RST.1 UFT.5 | length 233.8
  Top Layer w10: UFT.5 3054.25,-484.25 3115,-545 3115,-590 3145,-620 RST.1
USPDP: RST.2
V-USB2: C_USB2.1 CFT1.2 CFT2.2 CFT3.2 FB2.2 R245.1 UFT.3 UFT.4 UFT.13 UFT.26 | length 1993.6
  Top Layer w16: UFT.26 2776.26,-527.24 2839.25,-464.25 ; v2(2835,-255) 2839.25,-259.25 UFT.13 2839.25,-464.25 ; v2(2915,-255) 3090,-255 3118.46,-226.54 R245.1 v2(3235,-120) ; UFT.4 UFT.3 ; CFT2.2 3094,-617.46 3094,-579 3062.24,-547.24 UFT.3 ; 2839.25,-464.25 2922.24,-547.24 UFT.3
  Bottom Layer w16: v2(2835,-255) v2(2915,-255) ; v2(3235,-120) 3597.6,-482.6 FB2.2
V_USB: C_USB.1 D3.2 FB1.2 | length 706.3
  Top Layer w20: D3.2@2923.74,-2122.6 v2(3132.6,-2122.6)
  Bottom Layer w20: v2(3132.6,-2122.6) FB1.2
VCC: C_out.1 Cn1.2 Cn2.2 Cn3.2 Cn4.2 Cn5.2 Cn6.2 Cn7.2 Cn8.2 Cn9.2 Cn10.2 Cn15.2 Cn16.2 Cn17.2 Cn18.2 Cn19.2 Cn20.2 Cn21.2 Cn22.2 Cn23.2 Cn30.1 Cn.1 D3.1 L1.2 L2.1 P2.2 P3.4 P3.7 R1.2 R3.2 R4.2 R5.2 R8.1 R74.1 R77.1 R_RESET.1 U1.21 U1.52 U3.6 U3.15 U3.16 U3.17 U3.31 U3.32 U3.47 U3.57 U3.65 U3.70 U3.89 U5.4 U6.28 U7.20 U.14 U?.1 UO.14 | length 17776.6
  Top Layer w10: U3.16 U3.16@2189.72,-2800 ; R1.2 R1.2@2636.54,-2125 ; C_out.1@2760,-1785 C_out.1@2766.26,-1791.26
  Top Layer w14: P2.2 165,-1215 230,-1215 v2(290,-1155) ; v2@1315,-2802.2 U3.65 1557.2,-2802.2 ; v2(1340,-2540) 1397.48,-2597.48 U3.57 1562.48,-2597.48 1600,-2635 1600,-2760 1557.8,-2802.2 1557.2,-2802.2 ; U3.70 1564.84,-2930.16 1600,-2895 1600,-2845 1557.2,-2802.2
  Top Layer w16: U1.21 904.76,-1304.76 v2(915,-1315) 935,-1335 ; v2(1290,-1270) 1345,-1215 U6.28 ; 1430.16,-2930.16 U3.70 ; U3.47 1678.66,-2286.34 ; 1806.61,-3348.39 U3.89 ; U3.32 2062.52,-2257.48 2085,-2235 v2(2130,-2235) 2088.11,-2276.89 U3.31 ; U3.6 2363.11,-3058.11 v2(2380,-3075) ; U3.15 U3.16 U3.17 v2@2325,-2776.61 ; v2(2326.61,-2776.61) v2@2325,-2776.61 ; v2(2425,-2778.23) 2390,-2743.23 2356.61,-2776.61 v2@2325,-2776.61
  Top Layer w18: 1395.16,-2930.16 1430.16,-2930.16 ; 1678.66,-2286.34 1690,-2275 ; 1780,-3375 1806.61,-3348.39
  Top Layer w20: R5.2 R4.2 Cn17.2 R3.2 ; U?.1 380,-655 390,-655 420,-625 420,-540 552.4,-407.6 L2.1 795,-317.6 v2(795,-315) ; v2(290,-1155) v2(380,-1065) ; UO.14 360,-2195 v2(430,-2265) ; v2(600,-2585) v2(695,-2490) ; v2(865,-2805) 873.46,-2805 R_RESET.1 1001.54,-2861.54 1070.16,-2930.16 ; v2(900,-2285) U.14 ; U1.52 1156.73,-513.27 v2(1375,-295) ; 1395.16,-2930.16 1070.16,-2930.16 ; v2(1640,-2210) 1705,-2210 v2@1730,-2235 ; 1690,-2275 v2@1730,-2235 ; v2(1735,-2235) v2@1730,-2235 ; 1780,-3375 1515,-3375 1070.16,-2930.16 ; U7.20 2510,-1570 ; 2390,-2743.23 v2(2390,-2235) 2480,-2235 2588.46,-2126.54 R1.2 ; 2510.31,-1569.69 2510,-1570 ; L1.2 2555,-1565 2550,-1570 ; R1.2@2636.54,-2125 D3.1 C_out.1@2766.26,-1791.26 ; C_out.1@2760,-1785 C_out.1@2762.5,-1782.5 ; C_out.1 C_out.1@2762.5,-1782.5 ; U5.4 2808.07,-1736.93 C_out.1@2762.5,-1782.5 ; 2510,-1570 2550,-1570 ; 2550,-1570 C_out.1@2762.5,-1782.5
  Bottom Layer w16: v2(915,-1315) 960,-1360 1235,-1360 1290,-1305 v2(1290,-1270) ; v2(2380,-3075) 2380,-3070 2425,-3025 v2(2425,-2778.23)
  Bottom Layer w20: Cn1.2 30,-1180 P2.2 ; Cn2.2 151.54,-435 U?.1 ; v2(80,-2665) 520,-2665 v2(600,-2585) 430,-2415 v2(430,-2265) 430,-1295 v2(290,-1155) ; v2(380,-1065) 385,-1060 v2(385,-655) ; P3.7 490,-120 590,-120 P3.4 640,-172.53 782.47,-315 v2(795,-315) ; Cn3.2 v2(795,-315) ; v2(915,-1315) 915,-1510 800,-1625 800,-2035 975,-2210 ; R77.1 R74.1 1105,-3035 865,-2795 v2(865,-2805) 865,-2660 v2(695,-2490) v2(900,-2285) 975,-2210 ; Cn4.2 v2(1375,-295) 1340,-260 850,-260 v2(795,-315) ; v2(1640,-2210) 975,-2210 ; v2(1735,-2235) v2(2130,-2235) v2(2390,-2235)
  other v2: 1380,-3240 1315,-2930.16 1315,-2805 585,-406.54
W\R\: U1.33 U3.30 U6.27 | length 2047.1
  Top Layer w10: U1.33 1371.22,-1136.22 1400,-1165 v1(1585,-1165) U6.27 ; v1(2035,-1370) 2085,-1420 v1(2085,-2087.48) ; U3.30 v1(2187.52,-2190)
  Bottom Layer w10: v1(1585,-1165) 1830,-1165 v1(2035,-1370) ; v1(2085,-2087.48) v1(2187.52,-2190)
Y1_1: C11.1 U1.24 Y2.1 | length 834.6
  Top Layer w10: U1.24 999.25,-1292.83 ccw(c1099.25,-1292.83) 1028.54,-1363.54 1035.25,-1370.25 ccw(c1095,-1310.5) 1095,-1395 1288.43,-1395 cw(c1288.43,-1531.57) Y2.1@1385,-1435 ; C11.1 1465,-1465 1475,-1455 Y2.1@1552.17,-1455
Y1_2: C12.1 U1.23 Y2.2 | length 527.1
  Top Layer w10: U1.23 967.76,-1326.33 ccw(c1067.76,-1326.33) 997.05,-1397.05 1025.71,-1425.71 ccw(c1096.42,-1355) Y2.2@1096.42,-1455 ; C12.1@1117.83,-1659.37 Y2.2
Y4_1: C14.1 UFT.27 Y4.1 | length 479.5
  Top Layer w10: C14.1@2500,-855 Y4.1 ; Y4.1@2637.83,-865 2707.76,-865 ccw(c2707.76,-765) 2807.76,-765 UFT.27
Y4_2: C13.1 UFT.28 Y4.2 | length 459.5
  Top Layer w10: UFT.28 2839.25,-765 ccw(c2939.25,-765) 2939.25,-865 Y4.2@2992.17,-865 ; Y4.2 cw(c3010.63,-855) 3010.63,-851.54 C13.1@3155,-851.54
pads on no net: P2.3 P3.6 P3.8 S1.0 Sc1.0 Sc2.0 Sc3\.0 Sc4.0 U3.1 U3.2 U3.3 U3.35 U3.48 U3.49 U3.60 U3.66 U3.67 U3.68 U3.69 U3.71 U3.72 U3.73 U3.75 U3.76 U3.78 U3.79 U3.80 U3.81 U3.82 U3.84 U3.85 U3.87 U3.88 U3.90 U3.91 U3.92 U3.93 U3.94 U3.95 U3.97 U3.98 U3.99 U3.100 U4.7 U4.9 U4.10 U4.11 U4.12 U4.hole U?.3 UFT.1 UFT.2 UFT.10 UFT.11 UFT.31 UFT.32 UO.1 UO.2 UO.3 UO.4 UO.5 UO.6 UO.8 UO.9 UO.10 USB1.2 USB1.3

## Polygon pours and split planes (outlines as drawn)
GND on Top Layer "Top Layer" (hatched 90Degree grid 10 track 12, pour order 9): 0,-3402 3700,-3402 3700,0 0,0
GND on Bottom Layer "Bottom Layer" (hatched 90Degree grid 10 track 12, pour order 9): 0,-3402 3700,-3402 3700,0 0,0

## Keep-outs
Keep-Out Layer:
  lines w10: -10,-3410 3710,-3410 3710,0 -10,0 -10,-3405

## Text inside footprints (layer, text, board x,y; h text height)
P2: Top Overlay "10" at 100,-670 h50 r90; Top Overlay "9" at 200,-670 h50 r90; Top Overlay "1" at 200,-1210 h50 r90; Top Overlay "2" at 100,-1230 h50 r90